# EAGLE board freesoc_1.1 (EAGLE 6.2)
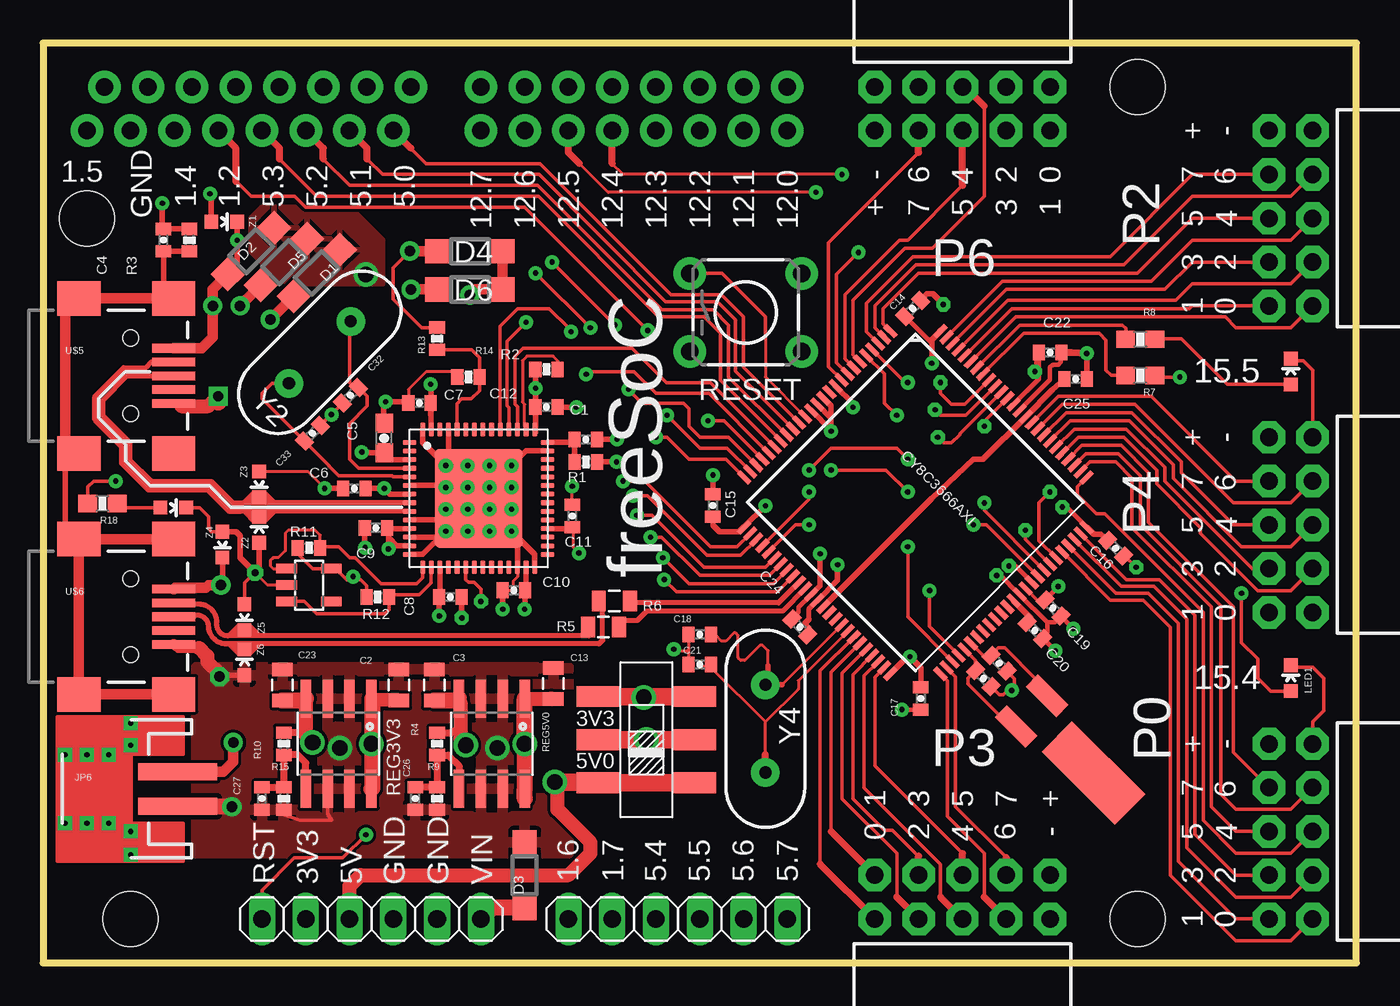
[diagram p0: board, top side]
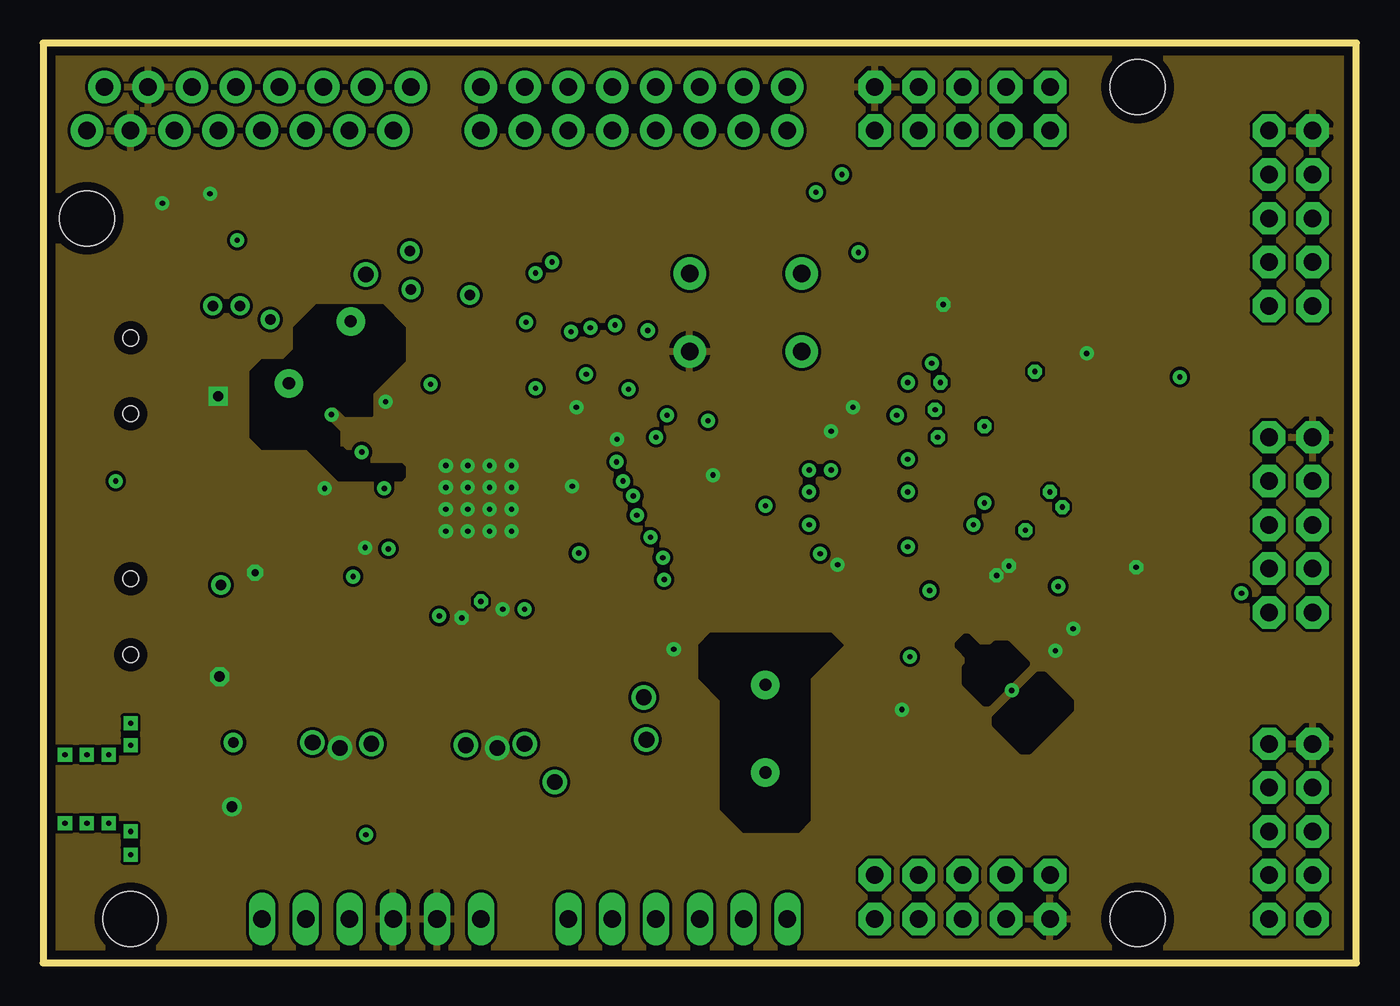
[diagram p1: board, inner layer Route2]
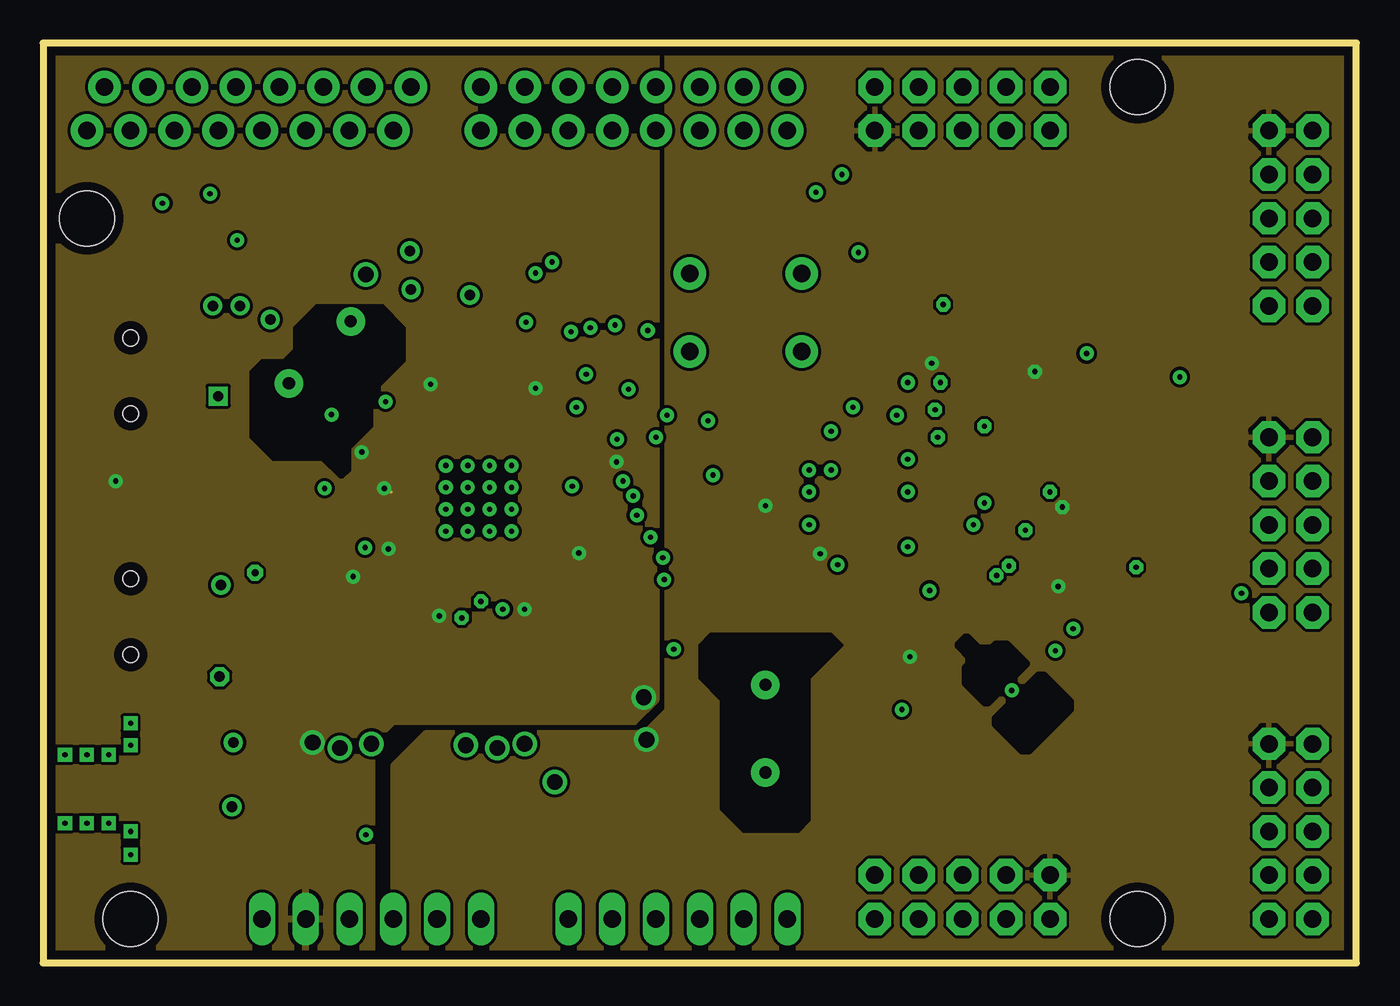
[diagram p2: board, inner layer Route15]
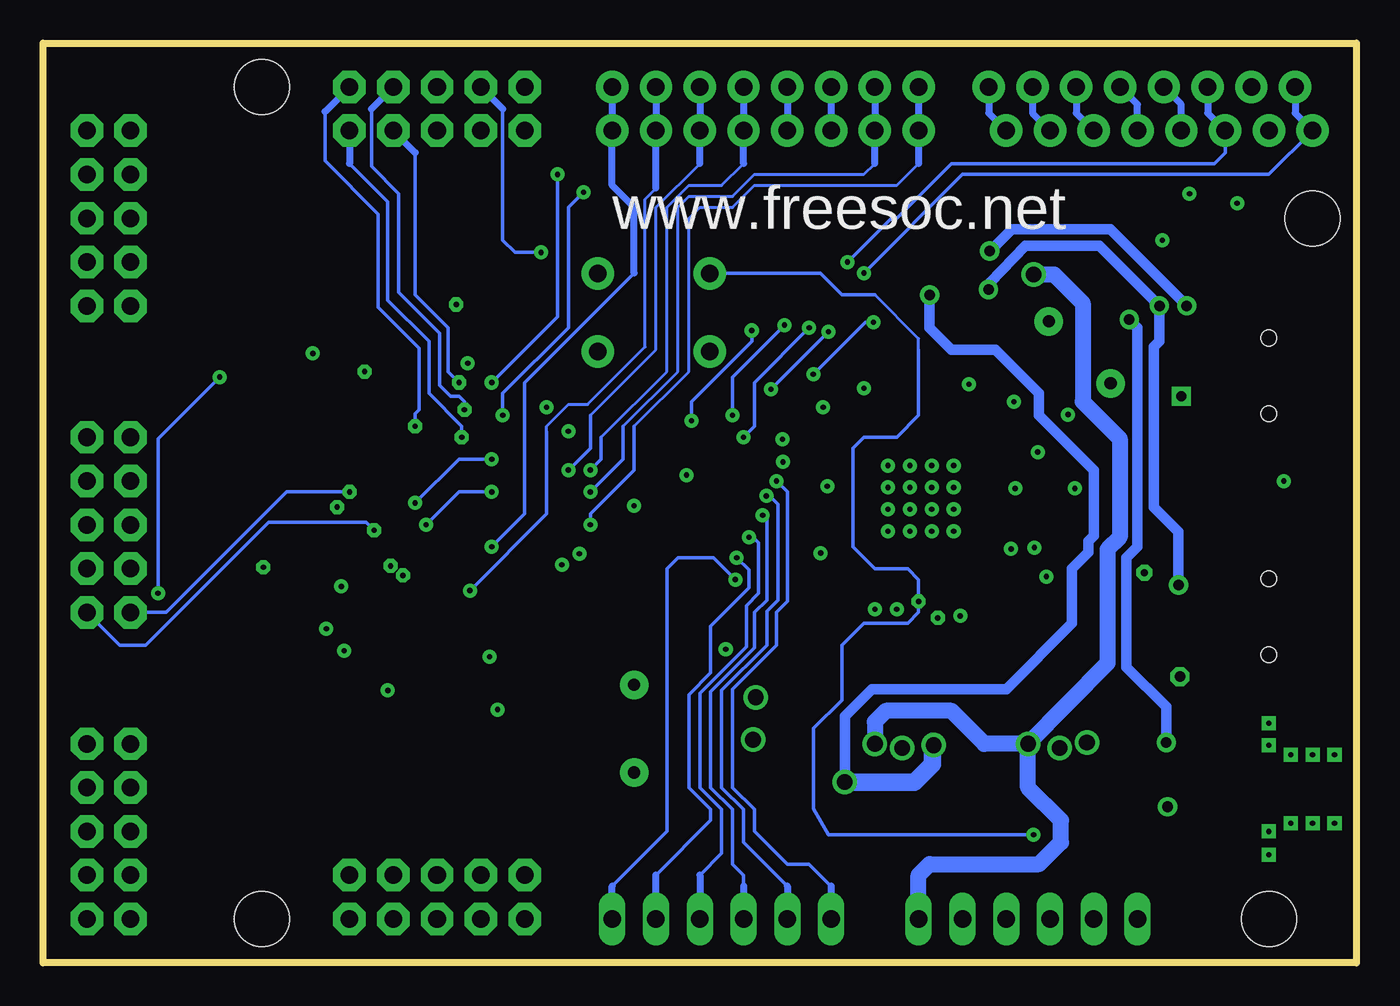
[diagram p3: board, bottom side, seen from below]

Size 76.2 x 53.34 mm. Coordinates in mm from the lower left corner, seen from the top.
Outline: 0,0 76.2,0 76.2,53.34 0,53.34 0,0
Copper layers (1*2*15*16): Top 0.035mm / dielectric 0.2mm / Route2 0.035mm / dielectric 0.15mm / Route15 0.035mm / dielectric 0.2mm / Bottom 0.035mm
Design rules: minimum track width 7mil, minimum drill 12mil, track to track 7mil, track to pad 7mil, pad to pad 7mil, via to via 7mil, smd to smd 7mil, copper to edge 20mil, drill to drill 12mil, minimum pad ring 10mil, minimum via ring 10mil, stop-mask expansion 2mil, vias tented up to drill 12mil, thermal gap 10mil
Holes 3.17 mm at 63.5,2.54 63.5,50.8 2.54,43.18 5.08,2.54

## Footprints (pad centres in the part's own frame; a part is rotated, then mirrored left to right if it is on the bottom)
1X06 = drill 1.016 long: 1 -6.35,0; 2 -3.81,0; 3 -1.27,0; 4 1.27,0; 5 3.81,0; 6 6.35,0
0402-CAP = smd 0.7 x 0.9: 1 -0.65,0; 2 0.65,0
0805 = smd 0.8 x 1.2: 1 -0.9,0; 2 0.9,0
0603-CAP = smd 1.1 x 1: 1 -0.85,0; 2 0.85,0
SOD123 = smd 1.4 x 1.4: A 1.9,0; C -1.9,0
TQFP-100 = smd 0.9 x 0.3: 1 -8.05,6; 2 -8.05,5.5; 3 -8.05,5; 4 -8.05,4.5; 5 -8.05,4; 6 -8.05,3.5; 7 -8.05,3; 8 -8.05,2.5; 9 -8.05,2; 10 -8.05,1.5; 11 -8.05,1; 12 -8.05,0.5; 13 -8.05,0; 14 -8.05,-0.5; 15 -8.05,-1; 16 -8.05,-1.5; 17 -8.05,-2; 18 -8.05,-2.5; 19 -8.05,-3; 20 -8.05,-3.5; 21 -8.05,-4; 22 -8.05,-4.5; 23 -8.05,-5; 24 -8.05,-5.5; 25 -8.05,-6; 51 8.05,-6; 52 8.05,-5.5; 53 8.05,-5; 54 8.05,-4.5; 55 8.05,-4; 56 8.05,-3.5; 57 8.05,-3; 58 8.05,-2.5; 59 8.05,-2; 60 8.05,-1.5; 61 8.05,-1; 62 8.05,-0.5; 63 8.05,0; 64 8.05,0.5; 65 8.05,1; 66 8.05,1.5; 67 8.05,2; 68 8.05,2.5; 69 8.05,3; 70 8.05,3.5; 71 8.05,4; 72 8.05,4.5; 73 8.05,5; 74 8.05,5.5; 75 8.05,6 | smd 0.3 x 0.9: 26 -6,-8.05; 27 -5.5,-8.05; 28 -5,-8.05; 29 -4.5,-8.05; 30 -4,-8.05; 31 -3.5,-8.05; 32 -3,-8.05; 33 -2.5,-8.05; 34 -2,-8.05; 35 -1.5,-8.05; 36 -1,-8.05; 37 -0.5,-8.05; 38 0,-8.05; 39 0.5,-8.05; 40 1,-8.05; 41 1.5,-8.05; 42 2,-8.05; 43 2.5,-8.05; 44 3,-8.05; 45 3.5,-8.05; 46 4,-8.05; 47 4.5,-8.05; 48 5,-8.05; 49 5.5,-8.05; 50 6,-8.05; 76 6,8.05; 77 5.5,8.05; 78 5,8.05; 79 4.5,8.05; 80 4,8.05; 81 3.5,8.05; 82 3,8.05; 83 2.5,8.05; 84 2,8.05; 85 1.5,8.05; 86 1,8.05; 87 0.5,8.05; 88 0,8.05; 89 -0.5,8.05; 90 -1,8.05; 91 -1.5,8.05; 92 -2,8.05; 93 -2.5,8.05; 94 -3,8.05; 95 -3.5,8.05; 96 -4,8.05; 97 -4.5,8.05; 98 -5,8.05; 99 -5.5,8.05; 100 -6,8.05
QFN56 = smd 0.8 x 0.3: 1 -4,3.25; 2 -4,2.75; 3 -4,2.25; 4 -4,1.75; 5 -4,1.25; 6 -4,0.75; 7 -4,0.25; 8 -4,-0.25; 9 -4,-0.75; 10 -4,-1.25; 11 -4,-1.75; 12 -4,-2.25; 13 -4,-2.75; 14 -4,-3.25; 29 4,-3.25; 30 4,-2.75; 31 4,-2.25; 32 4,-1.75; 33 4,-1.25; 34 4,-0.75; 35 4,-0.25; 36 4,0.25; 37 4,0.75; 38 4,1.25; 39 4,1.75; 40 4,2.25; 41 4,2.75; 42 4,3.25 | smd 0.3 x 0.8: 15 -3.25,-4; 16 -2.75,-4; 17 -2.25,-4; 18 -1.75,-4; 19 -1.25,-4; 20 -0.75,-4; 21 -0.25,-4; 22 0.25,-4; 23 0.75,-4; 24 1.25,-4; 25 1.75,-4; 26 2.25,-4; 27 2.75,-4; 28 3.25,-4; 43 3.25,4; 44 2.75,4; 45 2.25,4; 46 1.75,4; 47 1.25,4; 48 0.75,4; 49 0.25,4; 50 -0.25,4; 51 -0.75,4; 52 -1.25,4; 53 -1.75,4; 54 -2.25,4; 55 -2.75,4; 56 -3.25,4 | smd 5.1 x 5.7: EPAD 0,0 | drill 0.305: P$1 0.635,-0.635; P$2 0.635,0.635; P$3 1.905,0.635; P$4 1.905,1.905; P$5 0.635,1.905; P$6 -0.635,1.905; P$7 -1.905,1.905; P$8 -1.905,0.635; P$9 -0.635,0.635; P$10 -0.635,-0.635; P$11 -1.905,-0.635; P$12 -1.905,-1.905; P$13 -0.635,-1.905; P$14 0.635,-1.905; P$15 1.905,-1.905; P$16 1.905,-0.635
SOT23-5L = smd 0.55 x 1.2: 1 -0.95,-1.3; 2 0,-1.3; 3 0.95,-1.3; 4 0.95,1.3; 5 -0.95,1.3
2X5-RAF = drill 1.016 pad 1.88 octagon: 1 -1.27,5.08; 2 1.27,5.08; 3 -1.27,2.54; 4 1.27,2.54; 5 -1.27,0; 6 1.27,0; 7 -1.27,-2.54; 8 1.27,-2.54; 9 -1.27,-5.08; 10 1.27,-5.08
JST-2-SMD = smd 1 x 4.6: 1 -1,-3.7; 2 1,-3.7
1X08 = drill 1.016 pad 1.88: 1 0,0; 2 2.54,0; 3 5.08,0; 4 7.62,0; 5 10.16,0; 6 12.7,0; 7 15.24,0; 8 17.78,0
LED-0603 = smd 0.8 x 0.8: A 0,-0.75; C 0,0.75
0402-RES = smd 0.7 x 0.9: 1 -0.65,0; 2 0.65,0
0603-RES = smd 1.1 x 1: 1 -0.85,0; 2 0.85,0
SO08 = smd 0.61 x 2.21: 1 -1.905,-2.616; 2 -0.635,-2.616; 3 0.635,-2.616; 4 1.905,-2.616; 5 1.905,2.616; 6 0.635,2.616; 7 -0.635,2.616; 8 -1.905,2.616
TACTILE-PTH = drill 1.016 pad 1.88: 1 -3.251,2.261; 2 3.251,2.261; 3 -3.251,-2.261; 4 3.251,-2.261
JS202011SCQN = smd 2.5 x 1.2: A1 -2.8,2.5; A2 2.8,2.5; B1 -2.8,-2.5; B2 2.8,-2.5; C1 -2.8,0; C2 2.8,0
USB-MINIB = smd 2.5 x 0.5: D+ 2.5,0; D- 2.5,0.8; GND 2.5,-1.6; ID 2.5,-0.8; VBUS 2.5,1.6 | smd 2.5 x 2: MTN1 -3,4.5; MTN2 2.5,4.5; MTN3 -3,-4.5; MTN4 2.5,-4.5 | hole 0.9: 0,2.2; 0,-2.2
HC49US = drill 0.7 pad 1.651: 1 -2.54,0; 2 2.54,0
CRYSTAL-32KHZ-SMD = smd 2.5 x 6: SHEILD 0,5.08 | smd 1 x 2.5: X1 -1.27,0; X2 1.27,0

## Placement (x,y rotation side)
ANALOG  M20-7820642  [1X06]  36.83,2.54 0 top
C1  0.1uF  [0402-CAP]  31.5,30.35 180 top
C2  10uF  [0805]  20.64,16.11 90 top
C3  10uF  [0805]  22.7,16.11 90 top
C4  10nF  [0402-CAP]  6.98,41.91 270 top
C5  2.2uF  [0603-CAP]  19.8,30.43 90 top
C6  0.1uF  [0402-CAP]  18.07,27.51 180 top
C7  0.1uF  [0402-CAP]  21.84,32.46 0 top
C8  0.1uF  [0402-CAP]  23.62,21.21 180 top
C9  0.1uF  [0402-CAP]  19.32,25.23 0 top
C10  0.1uF  [0402-CAP]  27.3,21.61 0 top
C11  0.1uF  [0402-CAP]  30.7,25.91 270 top
C12  0.1uF  [0402-CAP]  29.21,32.23 180 top
C13  10uF  [0805]  29.61,16.19 90 top
C14  0.1uF  [0402-CAP]  50.45,37.95 45 top
C15  0.1uF  [0402-CAP]  38.86,26.51 270 top
C16  0.1uF  [0402-CAP]  62.23,24.05 315 top
C17  0.1uF  [0402-CAP]  50.93,15.34 90 top
C18  18pF  [0402-CAP]  38.1,19.05 180 top
C19  1.0uF  [0402-CAP]  58.59,20.57 135 top
C20  1.0uF  [0402-CAP]  57.55,19.27 135 top
C21  18pF  [0402-CAP]  38.1,17.3 180 top
C22  1.0uF  [0402-CAP]  58.42,35.4 180 top
C23  10uF  [0805]  13.89,16.11 90 top
C24  1.0uF  [0402-CAP]  43.91,19.48 315 top
C25  1.0uF  [0402-CAP]  59.91,33.86 0 top
C26  10nF  [0402-CAP]  21.59,9.52 270 top
C27  10nF  [0402-CAP]  12.7,9.52 270 top
C29  18pF  [0402-CAP]  54.56,16.48 315 top
C30  18pF  [0402-CAP]  55.47,17.37 315 top
C32  12pF  [0402-CAP]  17.83,32.91 225 top
C33  12pF  [0402-CAP]  15.63,30.71 45 top
D1  PMEG3010ER  [SOD123]  15.88,40.01 225 top
D2  PMEG3010ER  [SOD123]  12.06,41.27 225 top
D3  PMEG3010ER  [SOD123]  27.94,5.08 90 top
D4  PMEG3010ER  [SOD123]  24.77,41.27 180 top
D5  PMEG3010ER  [SOD123]  13.97,40.64 225 top
D6  PMEG3010ER  [SOD123]  24.77,39.05 180 top
IC1  CY8C3X66AXI  [TQFP-100]  50.61,26.7 315 top
IC2  CY7C68015A  [QFN56]  25.27,26.93 0 top
IC4  24LC00OT  [SOT23-5L]  15.43,21.91 270 top
JP1  S5558-ND  [2X5-RAF]  72.39,7.62 0 top
JP2  S5558-ND  [2X5-RAF]  72.39,25.4 0 top
JP3  S5558-ND  [2X5-RAF]  53.34,3.81 270 top
JP4  S5558-ND  [2X5-RAF]  53.34,49.53 90 top
JP5  S5558-ND  [2X5-RAF]  72.39,43.18 0 top
JP6  455-1749-1-ND  [JST-2-SMD]  4.11,10.08 90 top
JP7  M20-7820842  [1X08]  3.56,50.8 0 top
JP8  M20-7820842  [1X08]  25.4,50.8 0 top
JP9  M20-7820842  [1X08]  2.54,48.26 0 top
JP10  M20-7820842  [1X08]  25.4,48.26 0 top
LED1  VLMW1300-GS08  [LED-0603]  72.39,16.51 0 top
LED2  VLMW1300-GS08  [LED-0603]  72.39,34.29 0 top
LED5  VLMW1300-GS08  [LED-0603]  7.56,26.4 270 top
POWER  M20-7820642  [1X06]  19.05,2.54 0 top
R1  100k  [0402-RES]  31.5,29.05 0 top
R2  10k  [0402-RES]  29.21,34.42 180 top
R3  100k  [0402-RES]  8.49,41.91 270 top
R4  6.6k  [0402-RES]  22.86,12.7 90 top
R5  22  [0805]  32.51,19.48 0 top
R6  22  [0805]  33.15,20.97 0 top
R7  150  [0603-RES]  63.66,34.07 180 top
R8  150  [0603-RES]  63.66,36.16 180 top
R9  2.2k  [0402-RES]  22.86,9.52 90 top
R10  3.6k  [0402-RES]  13.97,12.7 90 top
R11  2.2k  [0402-RES]  15.43,24.07 180 top
R12  2.2k  [0402-RES]  19.42,21.21 180 top
R13  39K  [0402-RES]  22.86,36.2 90 top
R14  62K  [0402-RES]  24.69,33.97 0 top
R15  2.2k  [0402-RES]  13.97,9.52 90 top
R18  150  [0603-RES]  3.44,26.64 180 top
REG3V3  NCP5500  [SO08]  17.15,12.7 180 top
REG5V0  NCP5500  [SO08]  26.03,12.7 180 top
S2  TL1105DF250Q  [TACTILE-PTH]  40.77,37.72 0 top
SW1  JS202011SCQN  [JS202011SCQN]  35,12.94 0 top
U$5  USB-MINIB-5PIN  [USB-MINIB]  5.08,34.04 0 top
U$6  USB-MINIB-5PIN  [USB-MINIB]  5.08,20.07 0 top
Y2  ATS240C  [HC49US]  16.06,35.4 225 top
Y3  AB26T-32.768KHZ  [CRYSTAL-32KHZ-SMD]  57.35,14.59 225 top
Y4  ATS240C  [HC49US]  41.91,13.57 270 top
Z1  CG0603MLC-05LE  [LED-0603]  10.51,42.98 270 top
Z2  CG0603MLC-05LE  [LED-0603]  12.54,25.12 0 top
Z3  CG0603MLC-05LE  [LED-0603]  12.54,27.75 180 top
Z4  CG0603MLC-05LE  [LED-0603]  10.41,24.25 180 top
Z5  CG0603MLC-05LE  [LED-0603]  11.68,20.05 180 top
Z6  CG0603MLC-05LE  [LED-0603]  11.68,17.42 0 top

## Library data of the parts
ANALOG POWER = pinhead
C1-C27 C29 C30 C32 C33 JP1-JP10 LED1 LED2 LED5 R1-R15 R18 REG3V3 REG5V0 S2 SW1 U$5 U$6 Y2-Y4 Z1-Z6 = SparkFun
D1-D6 = diode
IC1 = PSoC3
IC2 = cypress
IC4 = microchip

## Nets
5V: C3.1 D4.C D6.C POWER.3 R4.2 REG5V0.4 SW1.B1 SW1.B2
!XRES: IC1.15 IC2.20 POWER.1 S2.1
D+: IC2.8 U$5.D+ Z3.C
D-: IC2.9 U$5.D- Z2.C
DMINUS: R5.1 U$6.D- Z5.C
DPLUS: R6.1 U$6.D+ Z6.C
EESCL: IC2.15 IC4.1 R11.1
EESDA: IC2.16 IC4.3 R12.1
GND: C1.1 C2.2 C3.2 C4.1 C5.2 C6.2 C7.1 C8.1 C9.1 C10.1 C11.1 C12.1 C13.2 C14.2 C15.1 C16.2 C17.1 C18.2 C19.1 C20.1 C21.2 C22.1 C23.2 C24.2 C25.2 C26.2 C27.2 C29.2 C30.2 C32.2 C33.2 D3.A IC1.10 IC1.12 IC1.13 IC1.14 IC1.38 IC1.64 IC1.66 IC1.87 IC2.6 IC2.10 IC2.12 IC2.14 IC2.26 IC2.28 IC2.41 IC2.53 IC2.56 IC2.EPAD IC2.P$1 IC2.P$2 IC2.P$3 IC2.P$4 IC2.P$5 IC2.P$6 IC2.P$7 IC2.P$8 IC2.P$9 IC2.P$10 IC2.P$11 IC2.P$12 IC2.P$13 IC2.P$14 IC2.P$15 IC2.P$16 IC4.2 JP1.2 JP2.2 JP3.2 JP4.2 JP5.2 JP6.1 JP7.2 JP9.2 LED1.C LED2.C LED5.C POWER.4 POWER.5 R3.1 R9.1 R14.1 R15.1 REG3V3.2 REG3V3.3 REG3V3.6 REG3V3.7 REG5V0.2 REG5V0.3 REG5V0.6 REG5V0.7 S2.3 U$5.GND U$6.GND Z1.A Z2.A Z3.A Z4.A Z5.A Z6.A
KXI: C30.1 IC1.56 Y3.X1
KXO: C29.1 IC1.55 Y3.X2
MXI: C21.1 IC1.43 Y4.2
MXO: C18.1 IC1.42 Y4.1
N$1: C1.2 IC2.42 R1.1
N$2: D1.A JP6.2
N$5: IC2.44 R2.1
N$7: C20.2 IC1.63
N$8: IC1.35 R6.2
N$9: IC1.36 R5.2
N$11: LED1.A R7.1
N$12: LED2.A R8.1
N$13: C27.1 R10.1 R15.2 REG3V3.5
N$15: IC2.52 R13.1 R14.2
N$18: LED5.A R18.1
N$25: C26.1 R4.1 R9.2 REG5V0.5
P00: IC1.71 JP1.10
P01: IC1.72 JP1.9
P02: IC1.73 JP1.8
P03: IC1.74 JP1.7
P04: IC1.76 JP1.6
P05: IC1.77 JP1.5
P06: IC1.78 JP1.4
P07: IC1.79 JP1.3
P12: IC1.22 JP7.4 JP9.4
P14: IC1.24 JP7.3 JP9.3
P15: IC1.25 JP7.1 JP9.1
P16: ANALOG.1 IC1.27
P17: ANALOG.2 IC1.28
P20: IC1.95 JP5.10
P21: IC1.96 JP5.9
P22: IC1.97 JP5.8
P23: IC1.98 JP5.7
P24: IC1.99 JP5.6
P25: IC1.1 JP5.5
P26: IC1.2 JP5.4
P27: IC1.3 JP5.3
P30: IC1.44 JP3.10
P31: IC1.45 JP3.9
P32: IC1.46 JP3.8
P33: IC1.47 JP3.7
P34: IC1.48 JP3.6
P35: IC1.49 JP3.5
P36: IC1.51 JP3.4
P37: IC1.52 JP3.3
P40: IC1.69 JP2.10
P41: IC1.70 JP2.9
P42: IC1.80 JP2.8
P43: IC1.81 JP2.7
P44: IC1.82 JP2.6
P45: IC1.83 JP2.5
P46: IC1.84 JP2.4
P47: IC1.85 JP2.3
P50: IC1.16 JP7.8 JP9.8
P51: IC1.17 JP7.7 JP9.7
P52: IC1.18 JP7.6 JP9.6
P53: IC1.19 JP7.5 JP9.5
P54: ANALOG.3 IC1.31
P55: ANALOG.4 IC1.32
P56: ANALOG.5 IC1.33
P57: ANALOG.6 IC1.34
P60: IC1.89 JP4.10
P61: IC1.90 JP4.9
P62: IC1.91 JP4.8
P63: IC1.92 JP4.7
P64: IC1.6 JP4.6
P65: IC1.7 JP4.5
P66: IC1.8 JP4.4
P67: IC1.9 JP4.3
P120: IC1.53 JP8.8 JP10.8
P121: IC1.54 JP8.7 JP10.7
P122: IC1.67 JP8.6 JP10.6
P123: IC1.68 JP8.5 JP10.5
P124: IC1.4 JP8.4 JP10.4
P125: IC1.5 JP8.3 JP10.3
P126: IC1.29 JP8.2 JP10.2
P127: IC1.30 JP8.1 JP10.1
P154: IC1.93 R7.2
P155: IC1.94 R8.2
SHIELD: C4.2 R3.2 U$5.MTN1 U$5.MTN2 U$5.MTN3 U$6.MTN1 U$6.MTN2 U$6.MTN3 U$6.MTN4
SWDCK: IC1.21 IC2.46
SWDIO: IC1.20 IC2.45
SWO: IC1.23 IC2.47
VBUS1: D2.A D4.A R13.2 U$5.VBUS Z1.C
VBUS2: D5.A D6.A U$6.VBUS Z4.C
VCCD: C25.1 IC1.39 IC1.86
VDD: C5.1 C6.1 C7.2 C8.2 C9.2 C10.2 C11.2 C12.2 C23.1 IC2.3 IC2.7 IC2.11 IC2.13 IC2.17 IC2.27 IC2.32 IC2.43 IC2.55 IC4.5 POWER.2 R1.2 R2.2 R10.2 R11.2 R12.2 R18.2 REG3V3.4 SW1.A1 SW1.A2
VIN: C2.1 C13.1 D1.C D2.C D3.C D5.C POWER.6 REG3V3.1 REG3V3.8 REG5V0.1 REG5V0.8
VPSOC: C14.1 C15.2 C16.1 C17.2 C19.2 C22.2 C24.1 IC1.26 IC1.37 IC1.50 IC1.65 IC1.75 IC1.88 IC1.100 JP1.1 JP2.1 JP3.1 JP4.1 JP5.1 SW1.C1 SW1.C2
XIN: C33.1 IC2.5 Y2.2
XOUT: C32.1 IC2.4 Y2.1

## Tracks (layer width: path | path; a pad name or v marks a point on that pad's centre or on a via)
5V  (via drill 0.61, 0.91)
  Top 0.203: 24.21,15.24 REG5V0.4
  Top 0.406: R4.2 23.75,13.35 24.13,13.73 24.13,13.97 24.21,15.08 24.21,15.24
  Top 0.61: D4.C D6.C 25.08,39.05 v24.77,38.73
  Top 0.813: 24.21,15.08 24.21,13.02 v24.53,12.62 | 32.16,10.48 SW1.B1 | POWER.3 17.78,4.45 18.41,5.08 30.48,5.08 31.75,6.35 31.75,6.99 29.84,8.89 29.84,10.32 v29.69,10.48
  Top 0.914: C3.1 24.03,15.21 REG5V0.4
  Top 1.016: v29.69,10.48 32.16,10.48 | SW1.B1 SW1.B2
  Bottom 0.61: v24.77,38.73 24.77,36.83 23.49,35.56 20.95,35.56 18.41,33.02 18.41,31.75 15.24,28.57 15.24,24.77 15.56,24.45 15.56,23.81 16.51,22.86 16.51,19.69 20.32,15.88 28.1,15.88 29.69,14.29 v29.69,10.48
  Bottom 0.813: 24.45,12.86 v24.53,12.62 24.61,12.86
  Bottom 1.016: 24.61,12.86 24.61,11.51 25.64,10.48 v29.69,10.48
!XRES  (via drill 0.3)
  Top 0.178: 41.91,36.2 41.91,33.99 IC1.15
  Top 0.203: v25.4,20.96 25.4,21.67 25,22.07 24.69,22.07 24.53,22.23 24.53,23.1 24.52,23.1 IC2.20 | S2.1 39.4,39.98 41.91,37.47 41.91,36.2 | v18.73,7.43 17.39,6.08 14.58,6.08 12.7,4.2 POWER.1
  Bottom 0.178: 25.4,35.56 25.4,36.2 27.94,38.73
  Bottom 0.203: 25.4,35.56 25.4,31.75 26.67,30.48 28.58,30.48 29.21,29.84 29.21,24.13 27.94,22.86 26.03,22.86 25.4,22.23 v25.4,20.96 25.4,20.32 26.03,19.69 28.58,19.69 29.84,18.41 29.84,15.24 31.5,13.59 31.5,8.94 30.62,7.43 v18.73,7.43 | S2.1 31.09,39.98 29.84,38.73 27.94,38.73
D+
  Top 0.203: 7.7,34.04 U$5.D+ | 12.54,26.68 Z3.C 12.54,27.3 | 11.83,26.67 11.91,26.67 | 11.83,26.67 11.59,26.67 12.22,27.3 12.54,27.3 | 11.83,26.67 12.3,27.15 | 12.54,27.3 12.86,27.3 13.49,26.67 13.26,26.67 12.86,27.07 12.86,26.91 13.02,26.75
  Top 0.279: IC2.8 12.54,26.68 11.62,26.68 | 7.7,34.04 4.88,34.04 3.48,32.64 3.48,31.7 5.03,30.15 5.03,29.19 6.3,27.91 9.75,27.91 11,26.67 11.59,26.67
D-
  Top 0.203: 7.69,34.85 U$5.D- | 11.75,26.04 12.22,25.56 | 12.22,25.56 12.22,25.8 11.83,26.19 11.99,26.19 | 11.99,26.19 12.22,25.96 | 11.99,26.19 12.21,26.19 Z2.C 12.71,25.87 12.86,25.72 13.02,25.88 | 13.49,26.19 12.86,25.56 12.22,25.56 | 13.26,26.11 13.02,25.88 | 13.02,25.88 13.02,26.04 | 11.75,26.04 11.59,26.19 11.47,26.19 11.46,26.18 | 11.75,26.04 11.91,26.04
  Top 0.279: IC2.9 11.46,26.18 10.8,26.18 9.55,27.43 6.11,27.43 4.55,28.99 4.55,29.95 3,31.5 3,32.84 4.67,34.52 5.97,34.52 6.3,34.85 7.69,34.85
DMINUS
  Top 0.203: R5.1 31.66,18.96 | 11.35,19.61 10.72,18.97 10.79,18.97 | 10.79,18.97 10.95,18.97 11.35,19.37 | 11.35,19.37 11.35,19.13 11.27,19.05 11.43,19.05 11.99,19.61 12.62,18.97 12.38,18.97 12.06,19.29 12.06,19.05 | 11.35,19.37 11.61,19.37 Z5.C | 10.79,18.97 10.72,18.96
  Top 0.279: 31.66,18.96 10.72,18.96 arc-90 10.08,19.6 10.08,19.76 arc90 9.05,20.8 8.73,20.8 arc90 8.02,20.87 U$6.D-
DPLUS
  Top 0.203: R6.1 32.51,20.15 | 11.35,17.86 10.72,18.49 10.95,18.49 11.43,18.02 11.43,18.18 11.27,18.34 11.43,18.34 | 11.43,18.34 11.51,18.34 11.99,17.86 12.54,18.41 12.38,18.41 12.06,18.1 12.06,18.26 12.14,18.34 | Z6.C 11.43,18.41 | 11.43,18.41 11.43,18.49 | 11.43,18.41 11.43,18.34
  Top 0.279: 32.46,20.88 32.46,18.7 32.26,18.49 11.43,18.49 10.64,18.49 arc-90 9.6,19.53 arc90 8.89,20.16 8.81,20.16 arc-90 8.72,20.07 U$6.D+
  Top 0.305: 32.46,20.88 32.37,20.97 R6.1
EESCL
  Top 0.178: 16.14,24.13 R11.1 16.08,24.8 15.8,25.08 14.21,25.08 14.05,24.92 14.05,23.89 13.65,23.5 13.34,23.5 13.18,23.34 13.18,23.02 13.34,22.86 IC4.1
  Top 0.203: IC2.15 22.02,22.34 21.67,21.99 19.61,21.99 18.1,23.5 17.78,23.5 17.15,24.13 16.14,24.13
EESDA
  Top 0.203: IC2.16 22.52,22.05 21.83,21.35 20.08,21.35 20.08,20.88 20.1,20.89 R12.1 20.08,21.21 20.08,20.48 19.81,20.24 15.88,20.24 15.16,20.96 IC4.3
GND  (via drill 0.3, 0.41, 0.6, 0.61, 0.91)
  Top 0.178: C11.1 v30.7,27.64 | 27.52,24.68 IC2.P$15 IC2.EPAD | 23.02,24.68 IC2.P$12 IC2.EPAD | 24.02,25.68 IC2.EPAD | 24.52,27.68 IC2.EPAD | 23.52,28.68 IC2.EPAD | C10.1 27.18,21.61 27.3,21.73 27.3,22.16 27.52,22.38 IC2.26 | 18.67,24.1 v18.69,24.08 | C18.2 37.45,18.1 | 37.45,18.1 C21.2 | v36.59,18.18 36.67,18.1 37.45,18.1 | R14.1 23.72,34.29 22.23,34.29 21.19,33.26 C7.1 | IC4.2 13.02,21.91 v12.3,22.62 | Z3.A 15.35,28.5 v16.34,27.51
  Top 0.203: Z5.A 11.68,22.05 v12.3,22.62 | C16.2 62.77,23.59 v63.42,22.94 | C30.2 56.36,16.48 56.36,16.11 v56.2,15.8 56.04,15.88 55.72,15.56 55.49,15.56 C29.2 | LED2.C 72.46,34.93 73.1,34.93 73.66,34.37 JP2.2 | LED1.C 72.5,17.14 73.66,17.14 74.29,16.51 74.29,14.61 73.66,13.97 JP1.2 | R15.1 13.97,8.57 14.92,8.25 16.75,8.25 16.51,8.65 REG3V3.6 | 16.19,30.96 16.19,31.27 C32.2 C33.2 16.1,31.17 v16.73,31.8 | LED5.C 9.08,26.4 9.6,25.88 9.6,25.16 9.76,25 Z4.A
  Top 0.254: C22.1 59.05,35.39 59.05,34.85 58.9,34.69 58.58,34.69 58.42,34.53 58.42,33.81 56.66,32.05 IC1.87 | 58.26,19.76 IC1.64 55.48,22.54 v55.32,22.46 | IC1.66 56.41,23.02 v56.04,23.02 | v49.83,14.68 50.15,14.69 C17.1 | 10.4,25.01 Z4.A | 58.26,19.76 58.26,19.15 58.02,18.91 58.02,18.73 | 58.26,19.76 58.7,19.76 59.02,20.08 59.05,20.08 | C19.1 59.61,19.56 v59.77,19.37 | C20.1 58.56,18.26 v58.74,18.1
  Top 0.279: 44.45,19.92 44.45,20.54 IC1.38
  Top 0.305: 7.22,42.56 R3.1 | C4.1 7.22,42.56 | 7.22,42.56 7.06,42.55 6.92,42.69 v6.92,44.05 | IC1.10 46.99,32.44 v46.99,32.23 | IC1.14 45.72,30.88 | IC1.13 45.72,31.59 | 45.72,31.59 45.72,30.88 | IC1.12 45.72,32.3 45.72,31.59 | 45.72,30.88 v45.72,30.83 | C1.1 32.89,30.35 v33.31,30.37 | C12.1 v30.94,32.23 | IC2.41 28.02,29.68 IC2.P$4 | IC2.26 27.52,24.68 | IC2.12 23.02,24.68 | IC2.10 24.02,25.68 | IC2.6 24.52,27.68 | IC2.53 23.52,28.68 | C10.1 26.66,20.84 v26.67,20.51 | C9.1 18.67,24.1 | C6.2 v16.34,27.51 | C7.1 21.11,32.38 21.11,32.54 v19.88,32.54 19.76,32.46 19.76,31.2 C5.2 | v46.1,23.08 46.1,22.18 IC1.38 | C15.1 v38.86,28.29 | C25.2 60.55,34.51 v60.55,35.34 | 44.45,19.92 44.21,19.69 44.21,19.61 44.45,19.37 44.5,19.18 C24.2 | C17.1 51.07,14.69 | C14.2 50.91,38.45 51.28,38.81 51.63,38.81 v52.23,38.18 | C8.1 24.27,20.46 v24.29,20 | Z6.A 10.48,16.67 v10.24,16.59 | IC2.14 22.02,23.68 IC2.P$12 | IC2.28 28.52,23.68 IC2.P$15 | IC2.56 22.02,30.18 IC2.P$7 | Z2.A 12.54,22.86 v12.3,22.62 11.43,23.5 11.43,24.77 11.19,25 Z4.A | Z1.A 9.76,44.53 v9.68,44.61
  Top 0.406: C22.1 59.69,35.4 v60.55,35.34 | U$5.GND 8.02,32.28
  Top 0.61: 10.24,16.75 v10.24,16.59 | 9.05,18.26 7.86,18.26 U$6.GND
  Top 0.813: 8.02,32.28 9.58,32.28 v10.16,32.86 | 10.24,16.75 9.52,17.46 9.52,17.78 9.05,18.26
  Top 0.914: JP6.1 10.76,9.08 v10.95,9.05
  Top 1.016: 10.16,32.54 v10.16,32.86
  Route2 0.254: v55.32,22.46 55.32,22.7 | v56.04,23.02 56.04,23.18
  Bottom 0.203: v56.2,15.8 55.96,15.72
  other vias: 17.22,12.46 26.35,12.46
  pour Route2: 0,53.34 76.2,53.34 76.2,0 0,0
  pour Top: 8.89,6.35 8.89,17.14 30.48,17.14 30.48,6.35
KXI
  Top 0.203: IC1.56 54.53,17.83 C30.1 55.44,18.26 55.8,18.26 57.61,16.44 Y3.X1
KXO
  Top 0.203: IC1.55 54.1,17.55 C29.1 53.66,16.5 53.66,16.19 55.52,14.33 Y3.X2
MXI
  Top 0.178: 42.15,11.03 Y4.2 | C21.1 38.27,17.14 38.73,17.14 41.91,13.97 | 41.91,13.97 41.91,13.98 41.92,13.98 43.82,15.88 43.82,16.36 IC1.43 | 41.91,12.07 41.91,13.97
  Top 0.406: Y4.2 41.91,12.07
MXO
  Top 0.178: IC1.42 42.86,16.11 | C18.1 38.97,19.05 39.37,18.65 39.61,18.65 40.08,19.13 40.16,19.13 40.32,18.97 40.32,17.7 40.48,17.54 40.72,17.54 41.59,18.41 41.75,18.41 42.07,18.1 42.07,17.22
  Top 0.305: 42.86,16.11 Y4.1 42.07,16.35 42.07,17.22
N$1
  Top 0.178: 30.93,30.18 C1.2
  Top 0.305: IC2.42 30.93,30.18 | C1.2 R1.1
N$2  (via drill 0.61)
  Top 0.61: JP6.2 10.45,11.08 11.03,11.67 v11.03,12.78 | v13.18,37.31 D1.A
  Bottom 0.61: v11.03,12.78 11.03,14.84 13.34,17.14 13.34,23.5 12.7,24.13 12.7,36.83 v13.18,37.31
  cutout Route15: 19.05,31.12 19.05,33.02 20.95,34.93 20.95,36.83 19.69,38.1 15.88,38.1 14.6,36.83 14.6,35.56 13.97,34.93 12.7,34.93 12.06,34.29 12.06,30.48 13.34,29.21 16.19,29.21 17.22,28.18 17.38,28.18 17.78,28.57 17.78,29.84
N$3
  cutout Route2: 12.7,29.84 15.32,29.84 17.15,28.02 20.8,28.02 20.95,28.18 20.95,28.73 20.8,28.89 18.34,28.89 17.38,29.84 17.15,29.84 17.15,30.8 16.19,31.75 16.19,31.91 16.59,32.31 16.99,32.31 17.54,31.75 19.05,31.75 19.05,33.02 20.95,34.93 20.95,36.83 19.69,38.1 15.88,38.1 14.6,36.83 14.6,35.56 13.97,34.93 12.7,34.93 12.06,34.29 12.06,30.48
N$4
  cutout Route2: 38.1,16.51 38.1,18.41 38.73,19.05 45.72,19.05 46.35,18.41 44.45,16.51 44.45,8.25 43.82,7.62 40.64,7.62 39.37,8.89 39.37,15.24
N$5
  Top 0.178: R2.1 29.86,34.91 29.59,35.18 28.07,35.18 27.81,34.93 27.81,32.51 27.94,32.38 27.94,31.12 28.02,31.03 IC2.44
N$6
  cutout Route15: 38.1,18.41 38.73,19.05 45.72,19.05 46.35,18.41 44.45,16.51 44.45,8.25 43.82,7.62 40.64,7.62 39.37,8.89 39.37,15.24 38.1,16.51
N$7
  Top 0.305: IC1.63 57.32,19.99 C20.2
N$8
  Top 0.254: 34.21,20.88 33.99,20.82 R6.2
  Top 0.279: IC1.35 42.67,20.88 34.21,20.88
N$9
  Top 0.279: IC1.36 42.9,20.4 35.02,20.4 34.47,19.84 33.34,19.84 33.42,19.76 33.42,19.37 33.41,19.37 R5.2
N$10  (via drill 0.3)
  other vias: 1.27,12.07
N$11  (via drill 0.3)
  Top 0.203: R7.1 64.6,33.97 v65.96,33.97 | v69.53,21.43 69.53,18.57 70.49,17.62 70.49,16.51 71.24,15.76 LED1.A
  Bottom 0.203: v65.96,33.97 69.53,30.4 v69.53,21.43
N$12
  Top 0.203: R8.1 64.54,36.2 66.04,36.2 68.69,33.54 LED2.A
N$13
  Top 0.203: 13.98,12.07 R10.1
  Top 0.406: R10.1 R15.2 C27.1 | REG3V3.5 15.24,11.59 14.76,12.07 13.98,12.07
N$14  (via drill 0.3)
  other vias: 2.54,12.07
N$15
  Top 0.203: IC2.52 24.02,32.44 24.29,32.7 24.84,32.7 25.32,33.18 25.32,33.96 R14.2 | R14.2 25.4,34.29 | R13.1 24.86,35.55 25.32,35.08 25.32,33.99 R14.2
N$16  (via drill 0.3)
  other vias: 3.81,12.07
N$17  (via drill 0.3)
  other vias: 5.08,13.89
N$18
  Top 0.203: R18.1 4.69,26.4 LED5.A
N$19  (via drill 0.3)
  other vias: 5.08,12.62
N$20  (via drill 0.3)
  other vias: 5.08,7.62
N$21  (via drill 0.3)
  other vias: 5.08,6.27
N$22  (via drill 0.3)
  other vias: 3.81,8.1
N$23  (via drill 0.3)
  other vias: 2.54,8.1
N$24  (via drill 0.3)
  other vias: 1.27,8.1
N$25
  Top 0.406: REG5V0.5 24.13,11.43 23.51,12.05 R4.1 R9.2 C26.1
N$26
  cutout Route2: 53.02,18.49 53.5,18.97 53.66,18.97 54.29,18.34 55.01,18.34 55.24,18.57 55.96,18.57 57.15,17.38 57.15,17.3 54.85,15 54.61,15 53.42,16.19 53.42,17.14 53.66,17.38 53.66,17.7 53.1,18.26 53.02,18.34
  cutout Route15: 53.02,18.49 53.5,18.97 53.66,18.97 54.29,18.34 55.01,18.34 55.24,18.57 55.96,18.57 57.15,17.38 57.15,17.3 54.85,15 54.61,15 53.42,16.19 53.42,17.14 53.66,17.38 53.66,17.7 53.1,18.26 53.02,18.34
N$27
  cutout Route2: 55.17,14.21 57.71,16.75 57.94,16.75 58.1,16.75 59.69,15.16 59.69,14.68 57.23,12.22 56.75,12.22 55.17,13.81
  cutout Route15: 55.17,14.21 57.71,16.75 57.94,16.75 58.1,16.75 59.69,15.16 59.69,14.68 57.23,12.22 56.75,12.22 55.17,13.81
P00
  Top 0.203: JP1.10 72.39,1.27 69.22,1.27 65.41,5.08 65.41,19.47 63.84,21.03 61.93,21.03 IC1.71
P01
  Top 0.203: JP1.9 69.22,2.54 65.88,5.87 65.88,19.7 65.87,19.7 64.13,21.43 62.24,21.43 IC1.72
P02
  Top 0.203: JP1.8 72.39,3.81 69.22,3.81 66.36,6.67 66.36,19.93 66.35,19.93 64.45,21.83 62.55,21.83 IC1.73
P03
  Top 0.203: JP1.7 69.22,5.08 66.83,7.46 66.83,20.16 64.77,22.23 62.86,22.23 IC1.74
P04
  Top 0.203: IC1.76 60.01,27.61 60.01,27.15 61.12,26.04 61.6,26.04 67.31,20.32 67.31,8.25 69.22,6.35 72.39,6.35 JP1.6
P05
  Top 0.203: IC1.77 60.75,29.05 62.23,29.05 63.18,28.1 63.18,25.24 67.79,20.64 67.79,9.05 69.22,7.62 JP1.5
P06
  Top 0.203: IC1.78 60.51,29.53 62.39,29.53 63.66,28.26 63.66,25.4 68.34,20.72 68.34,9.76 69.22,8.89 72.39,8.89 JP1.4
P07
  Top 0.203: IC1.79 60.28,30 62.55,30 64.13,28.42 64.13,25.56 69.06,20.64 69.06,12.22 JP1.3
P12  (via drill 0.3)
  Top 0.203: IC1.22 39.52,31.43 v38.58,31.43 | v35.08,36.67 27.94,43.81 15.24,43.81 14.6,44.45 12.06,44.45 11.19,45.32
  Top 0.406: 11.19,45.32 11.19,47.23 JP9.4
  Bottom 0.203: v38.58,31.43 38.58,32.54 35.08,36.04 v35.08,36.67
  Bottom 0.406: JP9.4 10.16,49.78 JP7.4
P14  (via drill 0.3)
  Top 0.203: IC1.24 39.69,29.84 38.1,29.84 v36.2,31.75 | v33.18,36.99 v29.53,40.64
  Bottom 0.203: v36.2,31.75 36.2,33.97 v33.18,36.99 | v29.53,40.64 26.99,43.18 26.67,43.18 23.49,46.36 8.25,46.36 7.62,46.99 JP9.3
  Bottom 0.406: JP7.3 8.64,49.28 JP9.3
P15  (via drill 0.3)
  Top 0.203: IC1.25 39.62,29.21 37.46,29.21 36.2,30.48 v35.56,30.48 | v31.75,36.83 v28.58,40.01
  Bottom 0.203: v35.56,30.48 34.92,31.12 34.92,33.66 v31.75,36.83 | v28.58,40.01 22.86,45.72 5.08,45.72 JP9.1
  Bottom 0.406: JP7.1 3.56,49.28 JP9.1
P16  (via drill 0.3)
  Top 0.203: IC1.27 40.27,24.13 38.73,24.13 34.92,27.94 v33.66,27.94
  Bottom 0.203: v33.66,27.94 33.02,27.3 33.02,20.96 33.66,20.32 33.66,18.41 36.2,15.88 36.2,10.16 34.92,8.89 34.92,7.62 33.02,5.72 31.75,5.72 30.48,4.45
  Bottom 0.406: 30.48,4.45 ANALOG.1
P17  (via drill 0.3)
  Top 0.203: IC1.28 40.47,23.62 38.53,23.62 35.08,27.08 v34.24,27.08
  Bottom 0.203: v34.24,27.08 34.06,27.08 33.58,26.59 33.58,21.03 34.21,20.4 34.21,18.41 36.83,15.8 36.83,10.16 35.56,8.89 35.56,6.99 33.02,4.45
  Bottom 0.406: 33.02,4.45 ANALOG.2
P20
  Top 0.203: IC1.95 56.43,37.47 68.58,37.47 69.22,36.83 72.39,36.83 JP5.10
P21
  Top 0.203: IC1.96 56.2,37.94 66.52,37.94 66.68,38.1 JP5.9
P22
  Top 0.203: IC1.97 55.97,38.42 65.72,38.42 66.68,39.37 72.39,39.37 JP5.8
P23
  Top 0.203: IC1.98 55.9,39.05 65.09,39.05 66.68,40.64 JP5.7
P24
  Top 0.203: IC1.99 55.67,39.53 64.29,39.53 66.68,41.91 72.39,41.91 JP5.6
P25
  Top 0.203: IC1.1 48.74,37.06 48.74,37.94 50.8,40.01 63.5,40.01 66.68,43.18 JP5.5
P26
  Top 0.203: IC1.2 48.26,36.83 48.26,38.1 50.64,40.48 62.71,40.48 66.68,44.45 72.39,44.45 JP5.4
P27
  Top 0.203: IC1.3 47.78,36.6 47.78,38.26 50.48,40.96 61.91,40.96 66.68,45.72 JP5.3
P30
  Top 0.203: IC1.44 45.09,16.93 45.09,5.72
  Top 0.406: 45.09,5.72 JP3.10
P31
  Top 0.203: IC1.45 45.72,16.85 45.72,7.62
  Top 0.406: 45.72,7.62 JP3.9
P32
  Top 0.203: IC1.46 46.35,16.78 46.35,9.52 49.53,6.35 49.53,3.81
  Top 0.406: 49.53,3.81 JP3.8
P33
  Top 0.203: 50.8,6.19 49.29,7.7 48.82,7.7 46.99,9.52 46.99,16.71 IC1.47
  Top 0.406: JP3.7 50.8,6.19
P34
  Top 0.203: IC1.48 47.62,16.64 47.62,10.16 52.07,5.72 52.07,3.81
  Top 0.406: 52.07,3.81 JP3.6
P35
  Top 0.203: 53.34,6.35 48.26,11.43 48.26,16.57 IC1.49
  Top 0.406: JP3.5 53.34,6.35
P36
  Top 0.203: IC1.51 52.47,16.35 52.47,8.49 54.61,6.35 54.61,3.81
  Top 0.406: 54.61,3.81 JP3.4
P37
  Top 0.203: IC1.52 52.94,16.59 52.94,9.05 55.88,6.11
  Top 0.406: 55.88,6.11 JP3.3
P40  (via drill 0.3)
  Top 0.203: v56.99,25.08 56.99,24.56 IC1.69
  Bottom 0.203: v56.99,25.08 57.47,25.56 63.1,25.56 70.25,18.41 71.75,18.41 JP2.10
P41  (via drill 0.3)
  Top 0.203: v58.42,27.3 57.79,26.67 57.79,24.48 IC1.70
  Bottom 0.203: v58.42,27.3 62.07,27.3 69.06,20.32 JP2.9
P42
  Top 0.203: JP2.8 72.39,21.59 70.49,21.59 67.15,24.92 67.15,25.24 64.61,27.78 64.61,28.57 62.71,30.48 60.05,30.48 IC1.80
P43
  Top 0.203: IC1.81 59.82,30.96 62.87,30.96 65.09,28.73 65.09,27.94 70.17,22.86 JP2.7
P44
  Top 0.203: IC1.82 59.59,31.43 63.02,31.43 65.56,28.89 65.56,28.1 69.53,24.13 72.39,24.13 JP2.6
P45
  Top 0.203: IC1.83 59.36,31.91 63.18,31.91 66.04,29.05 66.04,28.42 69.06,25.4 JP2.5
P46
  Top 0.203: IC1.84 59.13,32.38 63.34,32.38 69.06,26.67 72.39,26.67 JP2.4
P47
  Top 0.203: IC1.85 58.9,32.86 64.29,32.86 69.22,27.94 JP2.3
P50
  Top 0.203: IC1.16 40.64,34.55 40.64,37.47 39.37,38.73 36.43,38.73 28.84,46.36 22.23,46.36 21.34,47.24
  Top 0.406: 21.34,47.24 JP9.8
  Bottom 0.406: JP7.8 21.34,49.28 JP9.8
P51
  Top 0.203: IC1.17 40.16,34.32 40.16,37.31 39.13,38.34 36.12,38.34 28.76,45.72 19.69,45.72 18.8,46.61
  Top 0.406: 18.8,46.61 18.8,47.24 JP9.7
  Bottom 0.406: JP7.7 18.8,49.28 JP9.7
P52
  Top 0.203: 16.26,46.61 17.78,45.09 28.69,45.09 35.91,37.86 38.89,37.86 39.77,36.99 39.77,33.97 43.12,30.62 IC1.18
  Top 0.406: 16.26,46.61 16.26,47.24 JP9.6
  Bottom 0.406: JP7.6 16.26,49.28 JP9.6
P53
  Top 0.203: IC1.19 39.29,33.78 39.29,36.51 38.34,37.47 35.72,37.47 28.73,44.45 15.88,44.45 13.72,46.61
  Top 0.406: 13.72,46.61 13.72,47.24 JP9.5
  Bottom 0.406: JP9.5 12.7,49.78 JP7.5
P54  (via drill 0.3)
  Top 0.203: IC1.31 41.91,22.94 38.34,22.94 35.32,25.96 v34.45,25.96
  Bottom 0.203: v34.45,25.96 34.21,25.72 34.21,21.03 34.92,20.32 34.92,18.26 37.46,15.72 37.46,10.16 36.2,8.89 36.2,5.72 35.56,5.08 35.56,4.45
  Bottom 0.406: 35.56,4.45 ANALOG.3
P55  (via drill 0.3)
  Top 0.203: IC1.32 42.14,22.46 38.1,22.46 35.88,24.69 v35.24,24.69
  Bottom 0.203: 38.1,5.08 36.83,6.35 36.83,8.89 38.1,10.16 38.1,15.64 35.4,18.34 35.4,20.72 34.69,21.43 34.69,24.37 35,24.69 v35.24,24.69
  Bottom 0.254: v35.24,24.69 35.24,24.77
  Bottom 0.406: 38.1,5.08 ANALOG.4
P56  (via drill 0.3)
  Top 0.203: IC1.33 42.37,21.99 37.46,21.99 v35.96,23.5
  Bottom 0.203: 40.64,5.08 37.46,8.25 37.46,8.89 38.73,10.16 38.73,15.56 37.46,16.83 37.46,19.53 35.24,21.75 35.24,22.78 v35.96,23.5
  Bottom 0.406: ANALOG.5 40.64,5.08
P57  (via drill 0.3)
  Top 0.203: IC1.34 42.6,21.51 36.75,21.51 v36.04,22.23
  Bottom 0.203: 43.18,4.45 40.01,7.62 40.01,22.86 39.37,23.5 37.31,23.5 v36.04,22.23
  Bottom 0.406: ANALOG.6 43.18,4.45
P60  (via drill 0.3)
  Top 0.203: IC1.89 54.61,31.4 v54.61,31.12
  Bottom 0.203: 59.85,49.37 59.85,46.51 56.75,43.42 56.75,38.02 54.37,35.64 54.37,32.07 54.61,31.83 v54.61,31.12
  Bottom 0.406: JP4.10 59.85,49.37
P61  (via drill 0.3)
  Top 0.203: v51.91,30.48 52.23,30.16 52.71,30.16 53.18,30.64 53.18,30.68 IC1.90
  Bottom 0.203: 58.42,46.36 56.2,44.13 56.2,38.42 53.82,36.04 53.82,33.02 51.91,31.12 v51.91,30.48
  Bottom 0.406: JP4.9 58.42,46.36
P62  (via drill 0.3)
  Top 0.203: IC1.91 53.54,31.75 52.07,31.75 v51.75,32.07
  Bottom 0.203: v51.75,32.07 51.75,32.54 52.07,32.86 52.55,32.86 53.18,33.5 53.18,36.51 55.56,38.89 55.56,44.61 57.15,46.2 57.15,49.53
  Bottom 0.406: 57.15,49.53 JP4.8
P63  (via drill 0.3)
  Top 0.203: v52.07,33.66 52.07,33.02 52.71,32.38 53.47,32.38 IC1.92
  Bottom 0.203: 54.61,46.99 54.61,38.73 52.71,36.83 52.71,34.29 v52.07,33.66
  Bottom 0.406: JP4.7 54.61,46.99
P64
  Top 0.203: IC1.6 46.99,35.27 46.99,38.42 50.01,41.43 51.59,41.43 54.61,44.45 54.61,49.69 | 53.5,50.8 JP4.6
  Top 0.406: 54.61,49.69 53.5,50.8
P65
  Top 0.203: IC1.7 46.51,35.04 46.51,38.73 49.69,41.91 50.16,41.91 53.34,45.09
  Top 0.406: 53.34,45.09 JP4.5
P66  (via drill 0.3)
  Top 0.203: IC1.8 46.04,34.81 46.04,39.93 v47.31,41.2
  Bottom 0.203: v47.31,41.2 48.82,41.2 49.53,41.91 49.53,49.53
  Bottom 0.406: 49.53,49.53 JP4.4
P67
  Top 0.203: IC1.9 45.56,34.58 45.56,41.75 50.8,46.99
  Top 0.406: 50.8,46.99 JP4.3
P120  (via drill 0.3)
  Top 0.203: IC1.53 50.16,20.07 v50.16,24.13
  Bottom 0.203: v50.16,24.13 48.26,26.04 48.26,33.66 41.91,40.01
  Bottom 0.406: JP8.8 JP10.8 43.18,45.09 41.91,43.81 41.91,40.01
P121  (via drill 0.3)
  Top 0.203: IC1.54 51.43,19.51 v51.43,21.59
  Bottom 0.178: 46.99,30.8 46.99,31.12 45.72,32.38 44.61,32.38 41.27,35.72 41.27,44.29 40.64,44.93
  Bottom 0.203: v51.43,21.59 46.99,26.04 46.99,30.8
  Bottom 0.406: JP8.7 JP10.7 40.64,44.93
P122  (via drill 0.3)
  Top 0.203: IC1.67 54.74,25.4 v53.98,25.4 | v50.16,27.3 48.9,28.57 v45.72,28.57
  Bottom 0.178: 44.45,31.75 40.64,35.56 40.64,43.81 38.1,46.36
  Bottom 0.203: v53.98,25.4 52.07,27.3 v50.16,27.3 | v45.72,28.57 44.45,29.84 44.45,31.75
  Bottom 0.406: JP8.6 JP10.6 38.1,46.36
P123  (via drill 0.3)
  Top 0.203: IC1.68 54.61,26.24 v54.61,26.67 | v50.16,29.21 49.53,29.84 45.72,29.84 v44.45,28.57
  Bottom 0.178: 43.82,30.48 40.01,34.29 40.01,43.81 38.73,45.09 36.83,45.09 35.56,46.36
  Bottom 0.203: v54.61,26.67 52.07,29.21 v50.16,29.21 | v44.45,28.57 43.82,29.21 43.82,30.48
  Bottom 0.406: JP8.5 JP10.5 35.56,46.36
P124  (via drill 0.3)
  Top 0.178: v46.35,45.72 33.66,45.72 33.02,46.36
  Top 0.203: IC1.4 50.02,33.66 v50.16,33.66
  Top 0.406: 33.02,46.36 JP10.4
  Bottom 0.203: v50.16,33.66 46.35,37.47 v46.35,45.72
  Bottom 0.406: JP8.4 JP10.4
P125  (via drill 0.3)
  Top 0.178: v44.85,44.69 32.78,44.69 31.12,46.36
  Top 0.203: v49.53,31.75 48.82,32.46 48.82,34.15 IC1.5
  Top 0.406: 31.12,46.36 30.48,46.99 JP10.3
  Bottom 0.203: v44.85,44.69 45.72,43.81 45.72,36.83 49.53,33.02 v49.53,31.75
  Bottom 0.406: JP8.3 JP10.3
P126  (via drill 0.3)
  Top 0.203: IC1.29 44.45,26.9 v44.45,27.3
  Bottom 0.178: 42.55,31.12 39.37,34.29 39.37,43.81 38.73,44.45 36.2,44.45 34.92,45.72 28.58,45.72 27.94,46.36
  Bottom 0.203: 42.55,31.12 42.55,29.21 v44.45,27.3
  Bottom 0.406: JP8.2 JP10.2 27.94,46.36
P127  (via drill 0.3)
  Top 0.203: IC1.30 43.66,25.4 v44.45,25.4
  Bottom 0.178: 41.91,31.12 38.73,34.29 38.73,43.18 38.1,43.81 36.2,43.81 34.92,45.09 26.67,45.09 25.4,46.36
  Bottom 0.203: v44.45,25.4 44.45,26.04 41.91,28.57 41.91,31.12
  Bottom 0.406: JP8.1 JP10.1 25.4,46.36
P154
  Top 0.203: IC1.93 56.89,36.51 61.28,36.51 61.67,36.12 61.67,34.37 61.98,34.07 R7.2
P155
  Top 0.203: IC1.94 56.66,36.99 62.63,36.99 62.81,36.81 R8.2
SHIELD
  Top 0.305: R3.2 C4.2 6.98,39.26 U$5.MTN2 | 2.54,38.88 U$5.MTN1 | 1.57,29.54 1.57,28.88 1.27,28.57 1.27,24.81 U$6.MTN1
  Top 0.61: U$5.MTN2 U$5.MTN1 1.27,37.61 1.27,29.84 1.57,29.54 U$5.MTN3 | U$6.MTN2 U$6.MTN1 U$6.MTN3 U$6.MTN4
SWDCK  (via drill 0.3)
  Top 0.203: IC2.46 27.02,32.19 26.91,32.31 26.91,36.04 v28.02,37.15 | IC1.21 38.63,33.02 35.56,33.02 34.29,34.29 31.67,34.29 v31.51,34.13
  Bottom 0.203: v28.02,37.15 28.5,37.15 v31.51,34.13
SWDIO
  Top 0.203: IC2.45 27.52,32.25 27.38,32.38 27.38,35.16 27.86,35.64 34.18,35.64 36.17,33.66 38.73,33.66 IC1.20
SWO  (via drill 0.3)
  Top 0.203: IC2.47 26.52,36.92 27.54,37.94 29.37,37.94 30.48,36.83 30.56,36.67 v30.64,36.59 | v33.97,33.26 34.44,32.78 34.76,32.46 37.15,32.46 37.46,32.15 37.46,31.12 38.1,30.48 39.76,30.48 IC1.23
  Bottom 0.203: v30.64,36.59 v33.97,33.26
VBUS1  (via drill 0.3, 0.61)
  Top 0.203: R13.2 21.97,36.84 20.32,38.5 20.32,40.32 v21.27,41.27
  Top 0.305: Z1.C v11.26,41.91 11.26,40.47 D2.A
  Top 0.61: U$5.VBUS 7.7,35.64 9.21,35.64 9.84,36.27 v9.84,38.1 9.84,39.05 D2.A | D4.A v21.27,41.27
  Bottom 0.61: v21.27,41.27 20,42.55 14.29,42.55 v9.84,38.1
VBUS2  (via drill 0.61)
  Top 0.305: Z4.C 10.41,22 v10.32,21.91
  Top 0.61: D5.A v11.43,38.1 | v10.32,21.91 9.6,21.91 9.45,21.75 7.66,21.75 U$6.VBUS | D6.A v21.35,39.05
  Bottom 0.61: v10.32,21.91 10.32,25 11.75,26.43 11.75,35.72 11.43,36.04 v11.43,38.1 14.92,41.59 19.21,41.59 21.27,39.45 v21.35,39.05
VCCD
  Top 0.305: C25.1 58.55,33.22 IC1.86 54.54,29.21 53.98,29.21 51.56,26.96 50.29,25.67 IC1.39
VDD  (via drill 0.3, 0.91)
  Top 0.178: 28.56,30.77 IC2.43 | 28.56,32.62 v28.58,33.32 28.56,32.65 | 30.55,25.18 C11.2 30.75,25.26 30.75,24.1 v31.08,23.77 | 28.02,21.91 C10.2 | 23.02,21.74 C8.2 | 20.24,25.18 C9.2 20.03,25.29 | IC4.5 | 14.92,23.93 R11.2
  Top 0.203: R12.2 18.77,21.88 18.41,22.23 17.86,22.23 | 16.99,22.86 17.62,22.23 17.86,22.23 | 16.91,22.94 16.99,22.86 | 16.99,22.86 17.15,22.86 IC4.5 15.64,22.86 14.92,23.57 14.92,23.93 | 17.86,22.23 18.02,22.38 18,22.4 v17.99,22.4 | 13.98,13.34 R10.2 | R18.2 2.59,27.6 2.94,27.94 v4.21,27.94
  Top 0.305: C6.1 v19.8,27.51 20.12,27.18 IC2.7 | IC2.3 20.09,29.18 C5.1 18.45,29.58 v18.49,29.62 | R1.2 v33.27,29.05 | 28.56,30.77 C12.2 28.56,32.62 | R2.2 28.56,32.65 | IC2.32 30.55,25.18 | IC2.27 28.02,21.91 | C10.2 27.95,20.65 v27.94,20.51 | C8.2 22.97,20.84 v22.99,20.11 | IC2.17 23.02,21.74 | 20.52,24.18 20.03,24.67 | 20.03,24.67 20.03,25.29 | IC2.11 20.24,25.18 | 20.03,24.67 v20.03,24 arc-90 20.37,24.18 IC2.13 | 22.52,31.75 IC2.55 22.52,33.23 v22.48,33.56 | 22.52,31.75 22.52,31.96 22.48,32 | C7.2 22.49,31.78 22.52,31.75 | 33.58,15.4 v34.85,15.4
  Top 0.406: REG3V3.4 15.24,14.13 15.08,13.34 13.98,13.34
  Top 0.813: REG3V3.4 15.24,13.18 v15.64,12.78
  Top 0.914: 33.54,15.44 33.58,15.4 | C23.1 15.14,15.21 REG3V3.4
  Top 1.016: SW1.A2 SW1.A1 33.54,15.44
  Route15 0.178: v19.8,27.51 20.19,27.3
  pour Route15 (rank 2): 19.05,0 0,0 0,53.34 35.56,53.34 35.56,15.24 34.29,13.97 20.32,13.97 19.05,12.7
VIN  (via drill 0.91)
  Top 0.813: REG5V0.1 29.48,15.32 C13.1 | C2.1 19.1,15.27 REG3V3.1
  Top 0.914: D3.C 26.04,3.18 POWER.6 | 19.1,12.75 19.1,10.13 REG3V3.8 | REG5V0.1 v27.94,12.7 REG5V0.8 27.94,9.52 | 19.1,15.27 19.1,12.75 | 19.1,12.75 v19.05,12.7
  Bottom 0.914: v18.73,39.93 17.54,39.93 15.88,38.26 15.88,32.54 13.73,30.4 13.73,24.69 14.45,23.97 14.45,17.38 v19.05,12.7 | v19.05,12.7 21.59,12.7 23.49,14.61 27.3,14.61 27.94,13.97 v27.94,12.7 | POWER.6 25.4,5.08 24.77,5.72 18.41,5.72 17.15,6.99 17.15,8.25 19.05,10.16 v19.05,12.7
  pour Top: 12.06,41.27 13.97,39.37 19.69,39.37 19.69,41.91 17.78,43.81 12.7,43.81 12.06,43.18
VPSOC  (via drill 0.3, 0.91)
  Top 0.203: 60.57,25.25 IC1.75 | IC1.65 57.69,21.03 C19.2
  Top 0.254: 60.57,25.25 59.39,26.43 v59.13,26.43 | 43.34,19.96 43.08,19.86 C24.1 43.45,19.96 43.82,20.32 43.82,20.61 IC1.37 | C14.1 51.56,35.92 v51.56,34.77 | C22.2 57.77,33.85 IC1.88 57.79,33.87 57.79,35.32 57.63,35.48 57.63,34.61 v57.55,34.29 | C19.2 58.82,21.71 v58.9,21.83
  Top 0.305: C16.1 61.36,24.86 60.96,24.86 60.57,25.25 | IC1.37 45.09,21.88 v45.09,23.72 | 43.45,20.08 43.26,20 43.34,19.96 | v41.91,26.51 40.68,25.28 | 40.68,25.28 IC1.26 | C17.2 50.93,17.11 v50.29,17.75 50.15,17.75 IC1.50 | 40.68,25.28 40.39,24.99 39.24,24.99 38.86,25.37 38.86,25.75 38.73,25.88 38.85,25.88 C15.2 | v51.56,34.77 51.56,36.13 IC1.100 52.07,36.67 51.91,36.51
  Top 0.406: C24.1 43.45,19.99
  Top 1.016: SW1.C1 v35,12.94 SW1.C2
  Route15 0.254: v59.13,26.43 59.05,26.43
  pour Route15: 20.32,0 20.32,11.43 22.23,13.34 34.92,13.34 36.2,14.61 36.2,53.34 76.2,53.34 76.2,0
XIN
  Top 0.203: IC2.5 20.32,28.18 20.24,28.26 17.15,28.26 16.6,28.8 16.6,28.82 C33.1 12.7,32.72 12.7,33.02 13.28,33.61 Y2.2
XOUT
  Top 0.203: IC2.4 18.31,28.68 17.78,29.21 17.78,31.27 18.81,32.31 18.81,32.85 C32.1 18.06,33.37 17.78,33.66 17.78,37.12 Y2.1

## Text on the board
Top: TM | freeSoC Development Kit v1.1 | Released under the Creative Commons Attribution Share-Alike 3.0 License | http://creativecommons.org/licenses/by-sa/3.0 | Design by: Jon Moeller | http://freesoc.net/ | freeSoC is a trademark of moeller.io, LLC, and may only be used with permission
tPlace: + | 7 | 1.4 | 1.2 | 5.3 | 5.2 | 5.1 | 5.0 | + | 7 | P2 | 12.7 | 12.6 | 12.5 | 12.4 | 12.3 | 12.2 | 12.1 | 12.0 | P6 | RESET | + | 7 | P4 | freeSoC | P0 | + | P3 | 7 | 7 | + | 1.6 | 1.7 | 5.4 | 5.5 | 5.6 | 5.7
tNames: - | 1.5 | - | 6 | 4 | 2 | 0 | 6 | GND | 5 | 3 | 1 | 5 | 4 | 3 | 2 | 1 | 0 | 15.5 | - | 6 | 5 | 4 | 3 | 2 | 1 | 0 | 15.4 | 3V3 | - | 5V0 | 6 | 1 | 3 | 5 | 0 | 2 | 4 | 6 | - | 5 | 4 | 3 | 2 | RST | 3V3 | 5V | GND | GND | VIN | 1 | 0
bNames: www.freesoc.net